# Altium PCB Controller.PcbDoc
Units mm, origin at the board's own origin, x right, y up, seen from the top; angles counter-clockwise.
Board outline 37.1 x 39.5 mm, 2 copper layers (Top Layer, Bottom Layer); 16 components, 18 nets, 87 pads, 0 vias.
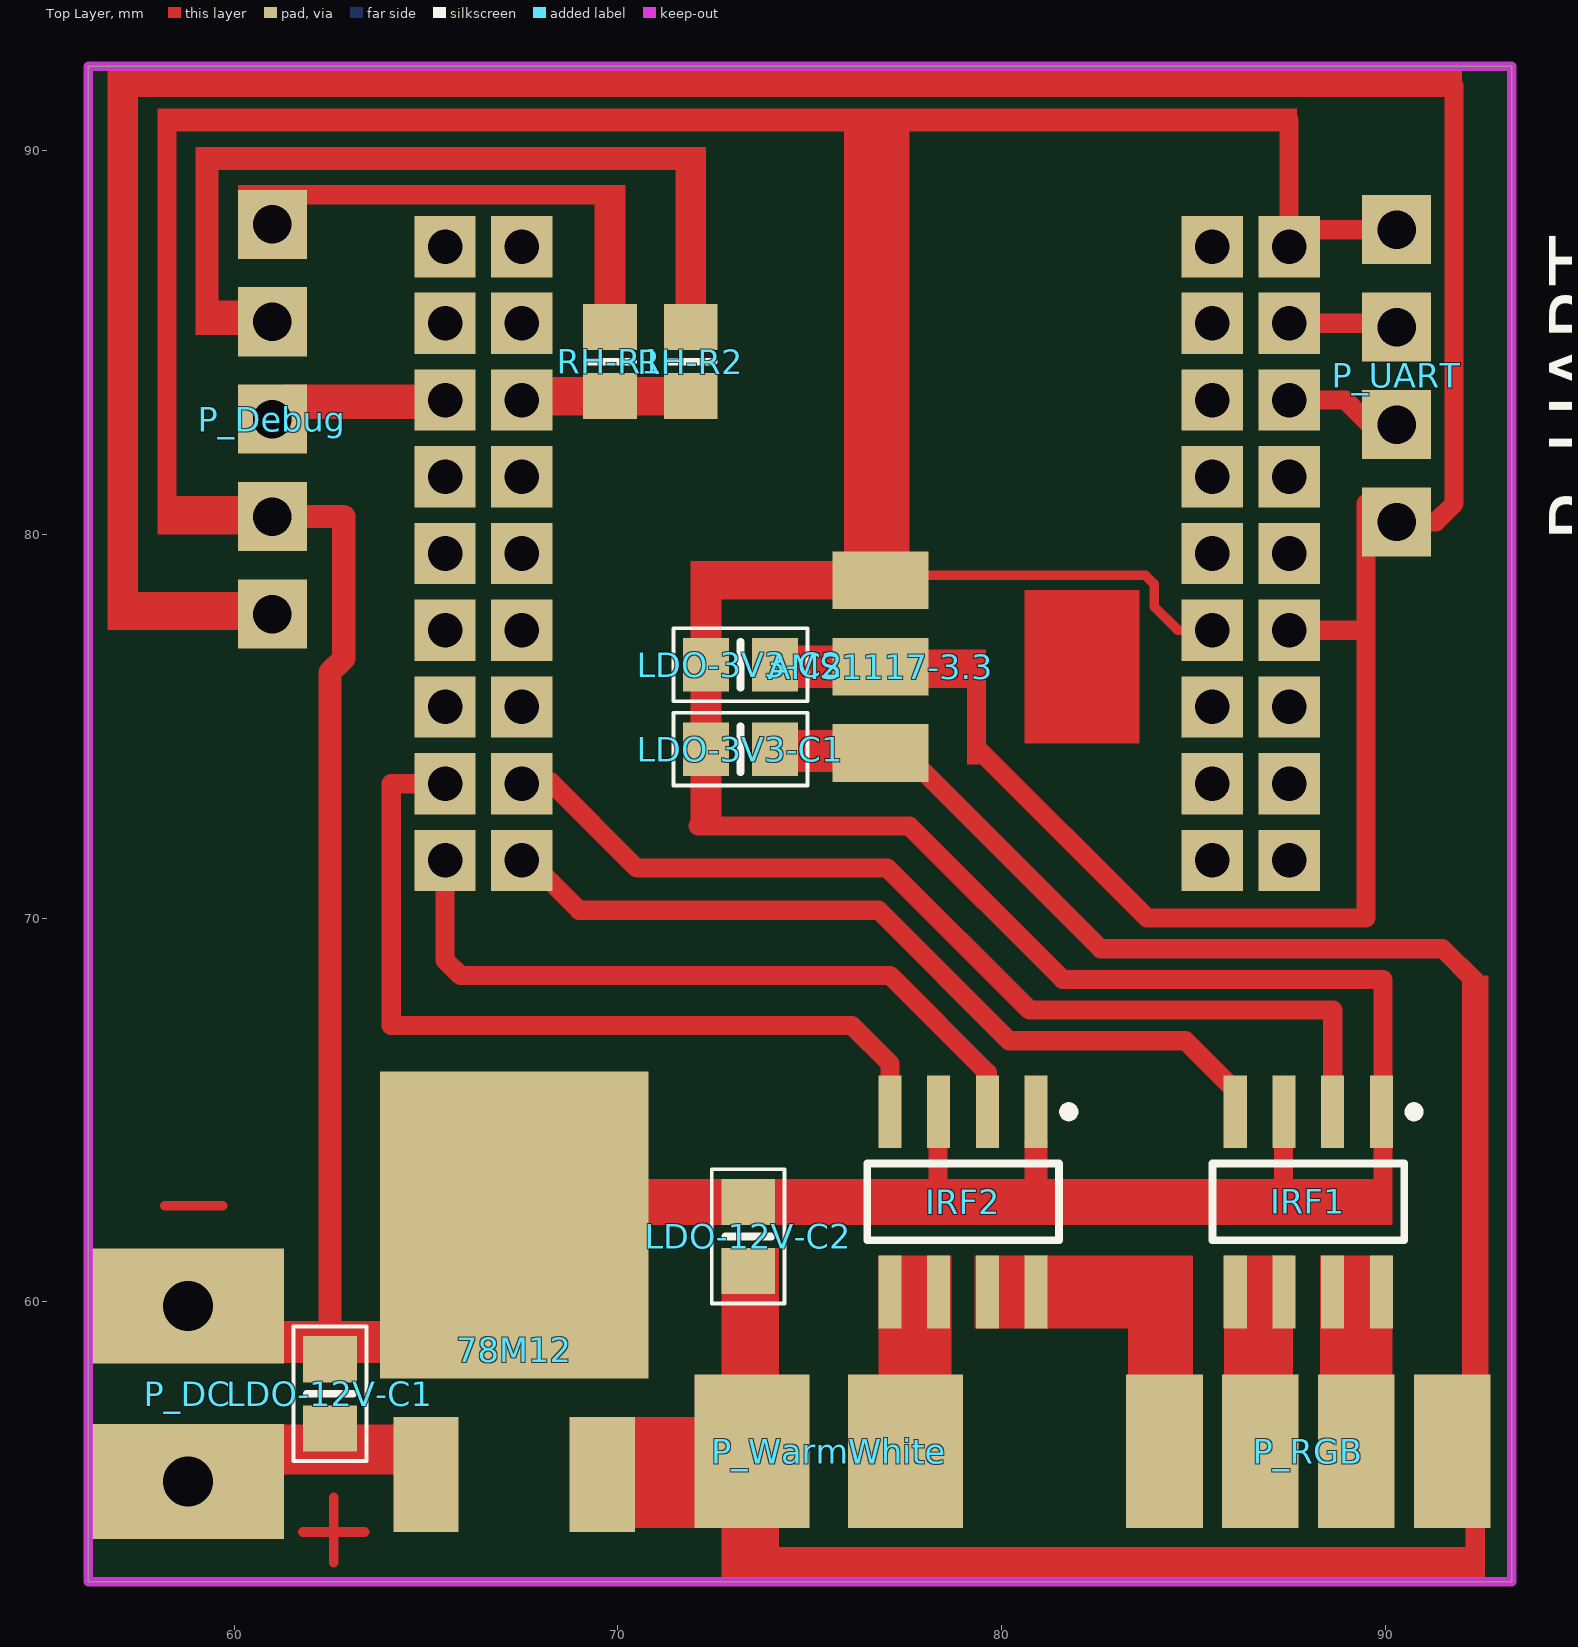
[diagram p0: Top Layer view]
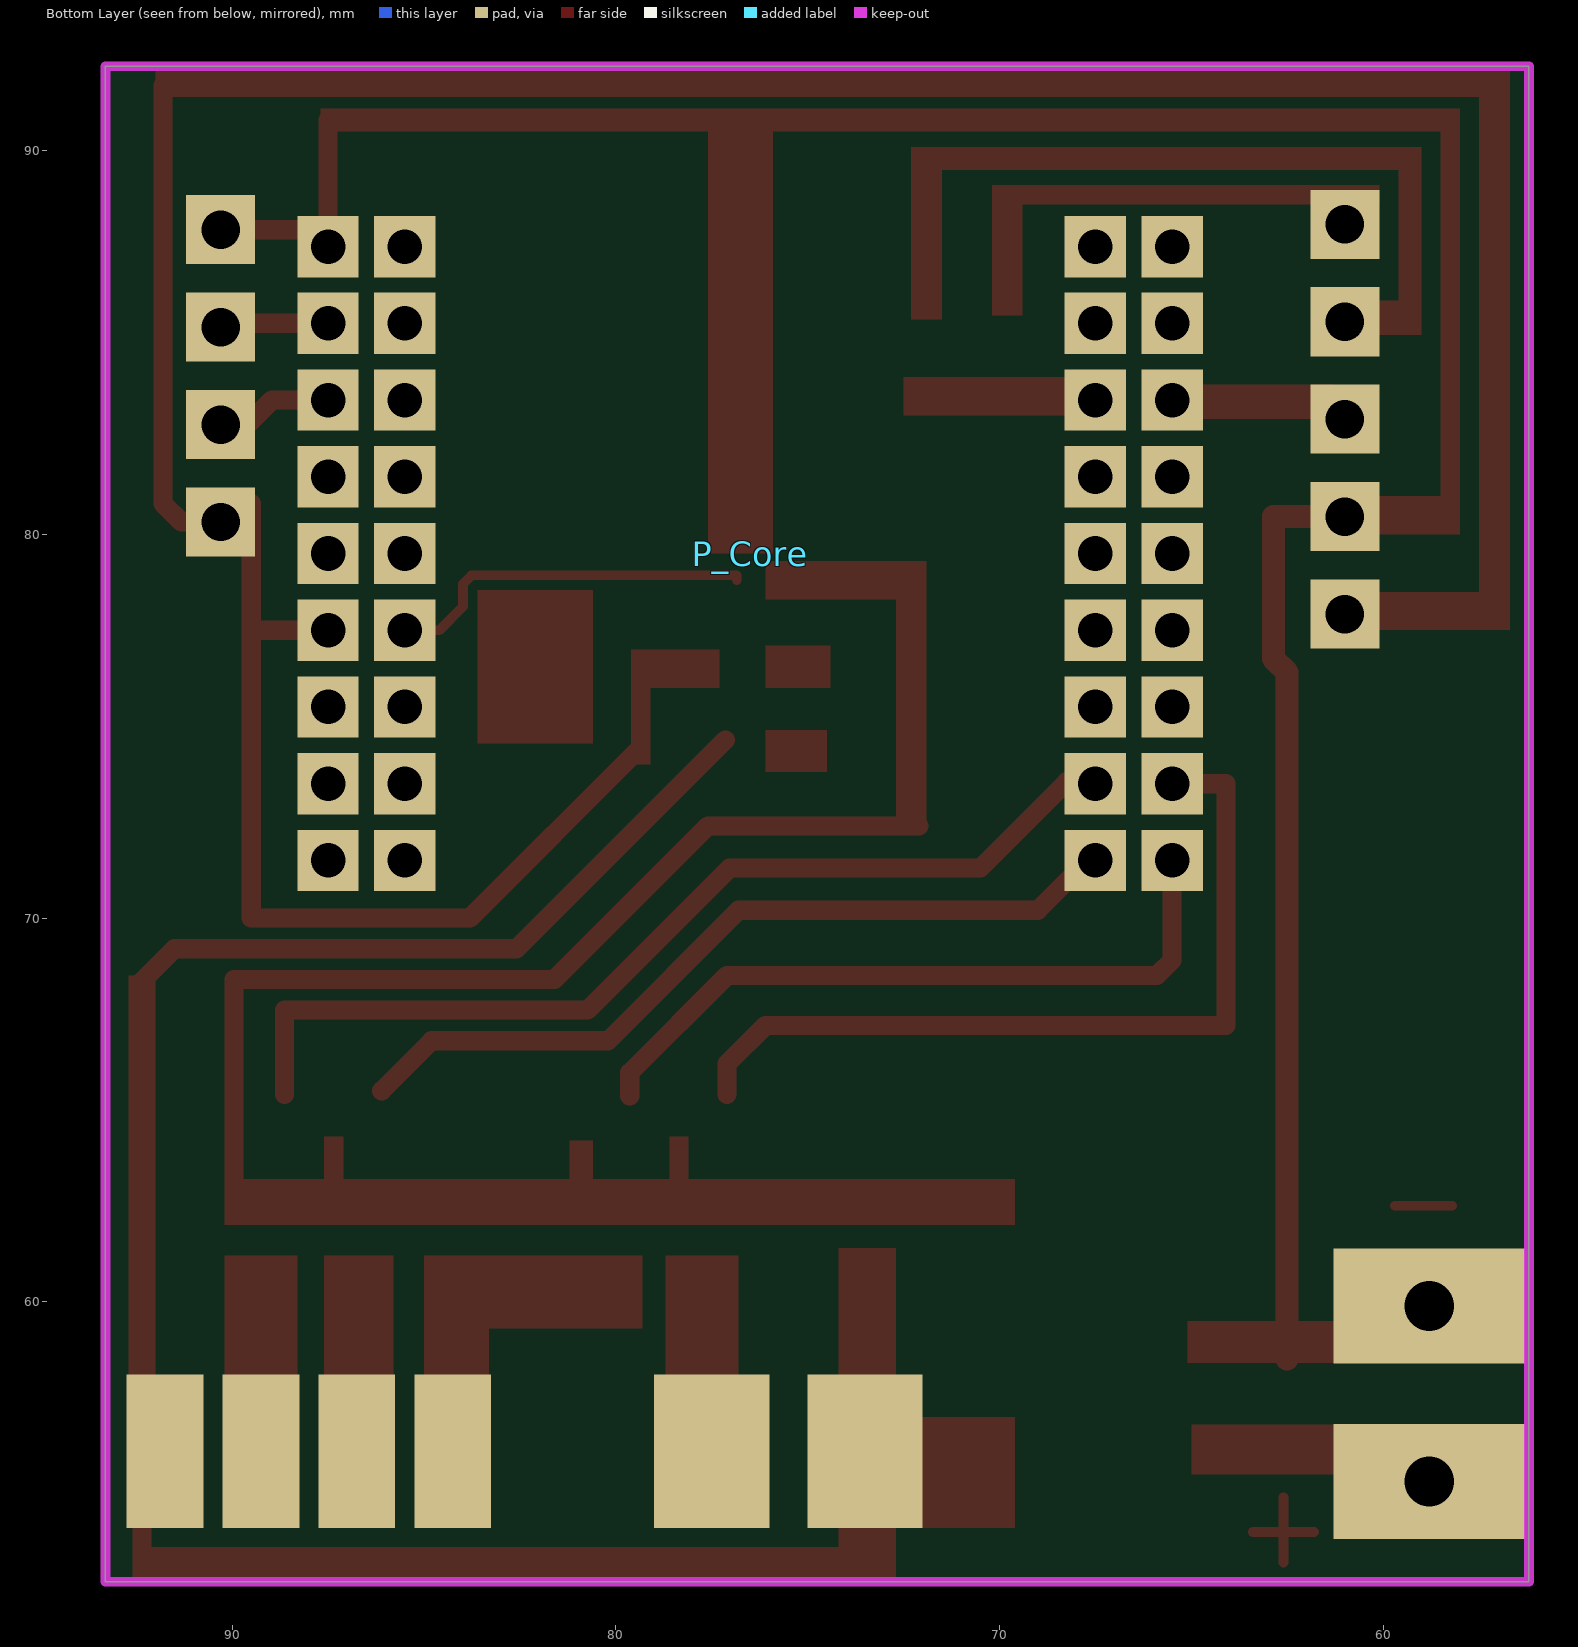
[diagram p1: Bottom Layer view, seen from below]
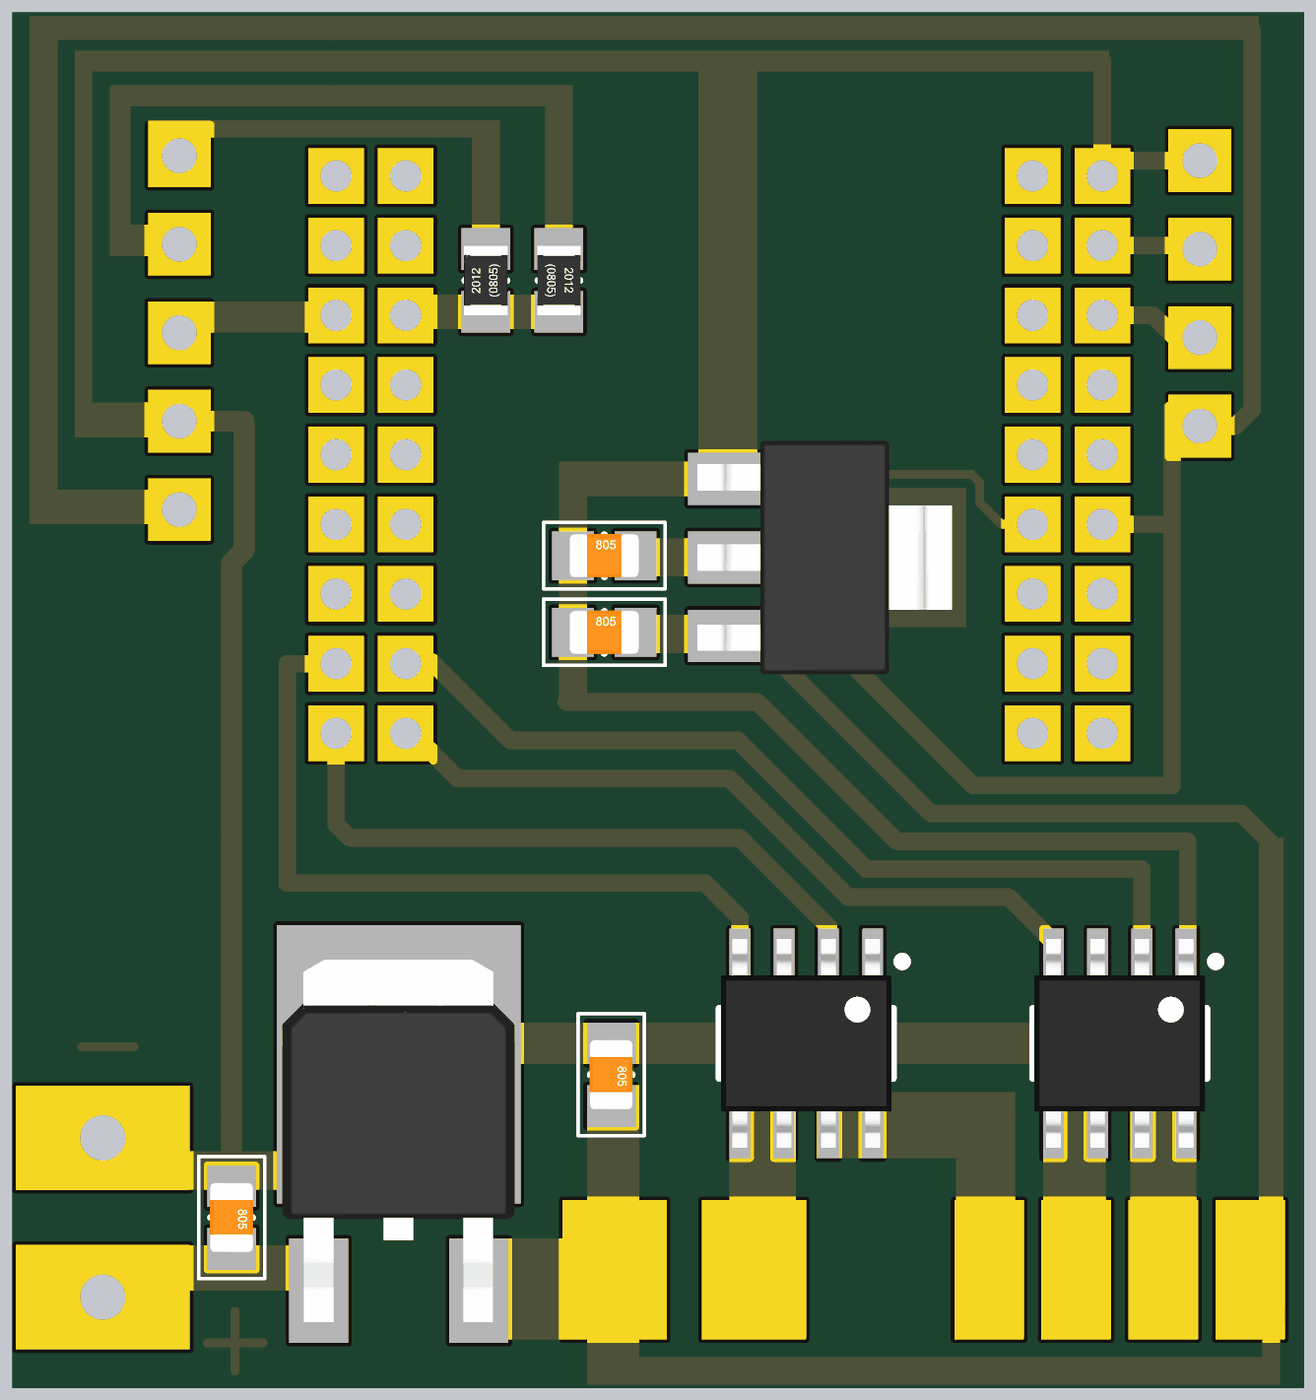
[diagram p2: 3D render of the assembled board from above, using the file's embedded part models]

## Layer stack, top to bottom
Top Solder: solder mask 0.0102, Solder Resist, Dk 3.5
Top Layer: signal copper 0.0356
Dielectric 1: dielectric 0.32, FR-4, Dk 4.8
Bottom Layer: signal copper 0.0356
Bottom Solder: solder mask 0.0102, Solder Resist, Dk 3.5

## Board outline
56.2,52.7 93.3,52.7 93.3,92.2 56.2,92.2

## Design rules (kind name [scope] priority, off if disabled: settings)
Clearance [All] p1: gap=0.254
PolygonConnect [All] p1: connectstyle=Relief reliefconductorwidth=0.254 reliefentries=4 polygonreliefangle="90 Angle" airgapwidth=0.254
RoutingVias [All] p1: holewidth=0.711 width=1.27 viastyle="Through Hole" minholewidth=0.711 minwidth=1.27 maxholewidth=0.711 maxwidth=1.27
SolderMaskExpansion [All] p1: expansion=0.102
UnpouredPolygon [All] p1: allowunpoured=FALSE
Width [All] p1: maxlimit=0.254 minlimit=0.254 preferedwidth=0.254
29 further rules are at their usual default settings.

## Classes and differential pairs
component class FETs: IRF1 IRF2 P_RGB P_WarmWhite
component class VR2: AMS1117-3.3 LDO-3V3-C1 LDO-3V3-C2
component class JTAG-to-SWD: RH-R1 RH-R2
component class Top: P_Core P_DC P_Debug P_UART
component class VR1: 78M12 LDO-12V-C1 LDO-12V-C2

## Components (designator, comment, footprint, x,y, rotation, side; value= is the part's Value field where it differs from the comment)
78M12 "LDO 12V" TO-252-AA 67.3,58.3 r0 top
AMS1117-3.3 "AMS1117" SOT-223-3 76.1,79.8 r270 top
IRF1 "IRF7301" SOIC-8 88,62.6 r270 top
IRF2 "IRF7301" SOIC-8 79,62.6 r270 top
LDO-3V3-C1 "1uF" "C 0805 / 2012" 73.2,74.4 r0 top
LDO-3V3-C2 "1uF" "C 0805 / 2012" 73.2,76.6 r0 top
LDO-12V-C1 "1uF" "C 0805 / 2012" 62.5,57.6 r270 top
LDO-12V-C2 "1uF" "C 0805 / 2012" 73.4,61.7 r270 top
P_Core "Core51822_2" Core51822 88.5,70.5 r180 bottom
P_DC "Power supply" "DC cable pad with holes" 58.8,57.6 r90 top
P_Debug "Header SWD 2" "Header 1x5 2.54mm" 61,83 r270 top
P_RGB "LED strip RGB" "LED strip RGB connector" 88,56.1 r180 top
P_UART "Header UART" "Header 1x4 2.54mm" 90.3,85.4 r90 top
P_WarmWhite "LED strip single color" "LED strip single color" 75.5,56.1 r0 top
RH-R1 "430R" "R 0805 / 2012" 69.8,84.5 r90 top
RH-R2 "430R" "R 0805 / 2012" 71.9,84.5 r270 top

## Footprints (in the part's own frame and the unit in brackets; to place one, negate y for a bottom-side part, rotate by r counter-clockwise, add the part's x,y. Pads: shape width x height; smd on the part's side, far side on the other; paste and mask are expansions set on the pad)
"C 0805 / 2012" [mm] "Capacitor 0805 / 2012 (2.0 x 1.2 mm)"
  rect 1.2x1.4 smd: 1(-0.9,0) 2(0.9,0)
  silkscreen extent -1.75,-0.95 1.75,0.95, body extent -1,-0.62 1,0.62, height 0.78
Core51822 [mm]
  rect 1.6x1.6 hole 0.9: 1(1,17) 2(3,17) 3(1,15) 4(3,15) 5(1,13) 6(3,13) 7(1,11) 8(3,11) 9(1,9) 10(3,9) 11(1,7) 12(3,7) 13(1,5) 14(3,5) 15(1,3) 16(3,3) 17(1,1) 18(3,1) 19(21,17) 20(23,17) 21(21,15) 22(23,15) 23(21,13) 24(23,13) 25(21,11) 26(23,11) 27(21,9) 28(23,9) 29(21,7) 30(23,7) 31(21,5) 32(23,5) 33(21,3) 34(23,3) 35(21,1) 36(23,1)
"DC cable pad with holes" [mm]
  rect 3x5 hole 1.3: 1(-2.286,0) 2(2.286,0)
"Header 1x4 2.54mm" [mm]
  rect 1.8x1.8 hole 1: 1(-5.08,0) 2(-2.54,0) 3(0,0) 4(2.54,0)
"Header 1x5 2.54mm" [mm]
  rect 1.8x1.8 hole 1: 1(-5.08,0) 2(-2.54,0) 3(0,0) 4(2.54,0) 5(5.08,0)
"LED strip RGB connector" [mm]
  rect 2x4 all layers, no hole: 1(-3.75,0) 2(-1.25,0) 3(1.25,0) 4(3.75,0)
"LED strip single color" [mm]
  rect 3x4 all layers, no hole: 1(-2,0) 2(2,0)
"R 0805 / 2012" [mm] "Resistor 0805 / 2012 (2.0 x 1.2 mm)"
  rect 1.2x1.4 smd: 1(-0.9,0) 2(0.9,0)
  silkscreen extent 0,-0.6 0,0.6, body extent -1,-0.62 1,0.62, height 0.45
SOIC-8 [mm] "SOIC, 8-Leads, Body 4.9x3.9mm, Pitch 1.27mm, IPC High Density"
  rect 1.9x0.6 smd: 1(-2.35,1.905) 2(-2.35,0.635) 3(-2.35,-0.635) 4(-2.35,-1.905) 5(2.35,-1.905) 6(2.35,-0.635) 7(2.35,0.635) 8(2.35,1.905)
  silkscreen extent -2.47,-2.5 1,2.88, body extent -3,-2.45 3,2.45, height 1.75
SOT-223-3 [mm]
  rect 1.5x2.5 smd: 1(1,0.75) 2(3.25,0.75) 3(5.5,0.75)
  Top Layer region: 1.25,4.5 5.25,4.5 5.25,7.5 1.25,7.5
  body extent -0.1,-0.22 6.6,7.08, height 1.8
TO-252-AA [mm]
  rect 1.7x3 smd: 1(-2.3,-2.8) 3(2.3,-2.8)
  rect 7x8 smd: 4(0,3.7)
  body extent -3.35,-3.7 3.33,6.7, height 2.4

## Part data
78M12: library part 78M12
AMS1117-3.3: "LDO 3.3V/5V/12V"
LDO-3V3-C1 LDO-3V3-C2 LDO-12V-C1 LDO-12V-C2: library part Capacitor
RH-R1 RH-R2: library part Resistor

## Nets (pads, with @x,y where several pads share a name; then routed paths per layer and width w, separated by ;. In a path a pad name is that pad's centre, name@x,y a point inside that pad or via, vN(x,y) a via of type N, cw(c..) or ccw(c..) an arc to the next point about the centre after c; other vN are vias at no path point)
3.3V: AMS1117-3.3.2 LDO-3V3-C2.2 P_Core.11 P_Debug.5 P_UART.1 | length 37.3
  Top Layer w0.5: 79.4,74.4 83.8,70 89.5,70 89.5,77.5 ; P_Core.11 89.5,77.5 ; P_UART.1@89.5,80.8 89.5,77.5 ; P_UART.1 91.32,80.32 91.8,80.8 91.8,91.7
12V: 78M12.3 AMS1117-3.3.3 LDO-3V3-C1.2 LDO-12V-C2.2 P_RGB.1 P_WarmWhite.1 | length 17.8
  Top Layer w0.5: AMS1117-3.3.3@77.143,74.643 82.586,69.2 91.5,69.2 92.357,68.343
GND: 78M12.4 AMS1117-3.3.1 IRF1.1 IRF1.3 IRF2.1 IRF2.3 LDO-3V3-C1.1 LDO-3V3-C2.1 LDO-12V-C1.1 LDO-12V-C2.1 P_Core.1 P_Core.12 P_DC.2 P_Debug.4 P_UART.4 | length 64.5
  Top Layer w0.254: AMS1117-3.3.1 76.85,78.931 83.758,78.931 83.981,78.708 83.981,78.119 84.6,77.5 P_Core.12
  Top Layer w0.5: 72.1,72.4 77.6,72.4 81.6,68.4 89.95,68.4 89.95,62.8 ; P_Core.1 87.5,90.8 ; P_Core.1@87.94,87.94 P_UART.4
  Top Layer w0.6: P_Debug.4 62.86,80.46 62.86,76.76 62.5,76.4 LDO-12V-C1.1
Net78M12_1: 78M12.1 LDO-12V-C1.2 P_DC.1
NetIRF1_2: IRF1.2 P_Core.33 | length 25
  Top Layer w0.5: P_Core.33@68.25,73.55 70.5,71.3 77.034,71.3 80.734,67.6 88.635,67.6 IRF1.2@88.635,65.4
NetIRF1_4: IRF1.4 P_Core.35 | length 21
  Top Layer w0.5: P_Core.35@67.6,71.6 69,70.2 76.8,70.2 80.2,66.8 84.8,66.8 IRF1.4@86.1,65.5
NetIRF1_5: IRF1.5 IRF1.6 P_RGB.3
NetIRF1_7: IRF1.7 IRF1.8 P_RGB.2
NetIRF2_2: IRF2.2 P_Core.36 | length 18.6
  Top Layer w0.5: P_Core.36 65.5,68.9 65.9,68.5 77.1,68.5 79.635,65.965 IRF2.2@79.635,65.365
NetIRF2_4: IRF2.4 P_Core.34 | length 21.9
  Top Layer w0.5: P_Core.34 64.1,73.5 64.1,67.2 76.1,67.2 77.1,66.2 IRF2.4@77.1,65.4
NetIRF2_5: IRF2.5 IRF2.6 P_WarmWhite.2
NetIRF2_7: IRF2.7 IRF2.8 P_RGB.4
SWDCLK: P_Core.24 P_Debug.3
SWDIO: P_Core.23 RH-R1.1 RH-R2.2
TDI: P_Debug.1 RH-R1.2
TDO: P_Debug.2 RH-R2.1
UART_RX: P_Core.5 P_UART.2 | length 3.1
  Top Layer w0.5: P_Core.5 88.96,83.5 89.6,82.86 P_UART.2
UART_TX: P_Core.3 P_UART.3 | length 2
  Top Layer w0.5: P_Core.3 P_UART.3@89.5,85.5
pads on no net: P_Core.2 P_Core.4 P_Core.6 P_Core.7 P_Core.8 P_Core.9 P_Core.10 P_Core.13 P_Core.14 P_Core.15 P_Core.16 P_Core.17 P_Core.18 P_Core.19 P_Core.20 P_Core.21 P_Core.22 P_Core.25 P_Core.26 P_Core.27 P_Core.28 P_Core.29 P_Core.30 P_Core.31 P_Core.32
copper on no net: | length 4.8
  Top Layer w0.254: 58.2,62.5 59.7,62.5 ; 61.8,54 63.4,54 ; 62.6,53.2 62.6,54.9

## Keep-outs
Keep-Out Layer:
  the board outline again, w0.254

## Other copper
Top Layer:
  rectangle net Net78M12_1: 60.6,55.5 65,56.8
  rectangle net GND: 60.7,58.4 65.1,59.5
  rectangle net 12V: 69.6,54.1 72.9,57
  rectangle net SWDCLK: 61.3,83 65.3,83.9
  rectangle net NetIRF2_5: 76.8,57.5 78.7,61.2
  rectangle net NetIRF2_7: 79.3,59.3 85,61.2
  rectangle net NetIRF2_7: 83.3,57.3 85,60.8
  rectangle net NetIRF1_5: 85.8,57.7 87.6,61.2
  rectangle net NetIRF1_7: 88.3,57.7 90.2,61.2
  rectangle net GND: 69.6,62 90.2,63.2
  rectangle net 12V: 92,55.5 92.7,68.5
  rectangle net 12V: 73,52.8 92.6,53.6
  rectangle net 12V: 92.1,53.1 92.6,54.7
  rectangle net 12V: 72.7,52.8 74.2,61.4
  rectangle net GND: 87.1,62.7 87.6,64.3
  rectangle net GND: 80.6,63 81.2,64.2
  rectangle net GND: 78.1,62.9 78.6,64.3
  rectangle net 3.3V: 77.3,76 79.6,77
  rectangle net 3.3V: 79.1,74 79.6,76
  rectangle net GND: 75.9,79.5 77.6,90.9
  rectangle net GND: 71.9,72.5 72.7,79.3
  rectangle net GND: 72.7,78.3 76.1,79.3
  rectangle net 12V: 74.5,73.8 76.1,74.9
  rectangle net 3.3V: 74.4,76 76.1,77.1
  rectangle net SWDIO: 67.6,83.1 72.5,84.1
  rectangle net TDI: 60.1,88.6 70.2,89.1
  rectangle net TDI: 69.4,85.7 70.2,88.6
  rectangle net TDO: 71.5,85.6 72.3,90.1
  rectangle net TDO: 59,89.5 71.5,90.1
  rectangle net TDO: 59,85.2 59.6,89.5
  rectangle net TDO: 59.3,85.2 60.8,86.1
  rectangle net 3.3V: 56.7,91.4 92,92.1
  rectangle net GND: 58,90.5 87.7,91.1
  rectangle net GND: 58,80 58.5,90.5
  rectangle net GND: 58.5,80 60.6,81
  rectangle net 3.3V: 56.7,77.5 57.5,91.4
  rectangle net 3.3V: 57.5,77.5 60.4,78.5